# EAGLE board mainboardv0.2.1 (EAGLE 6.5.0)
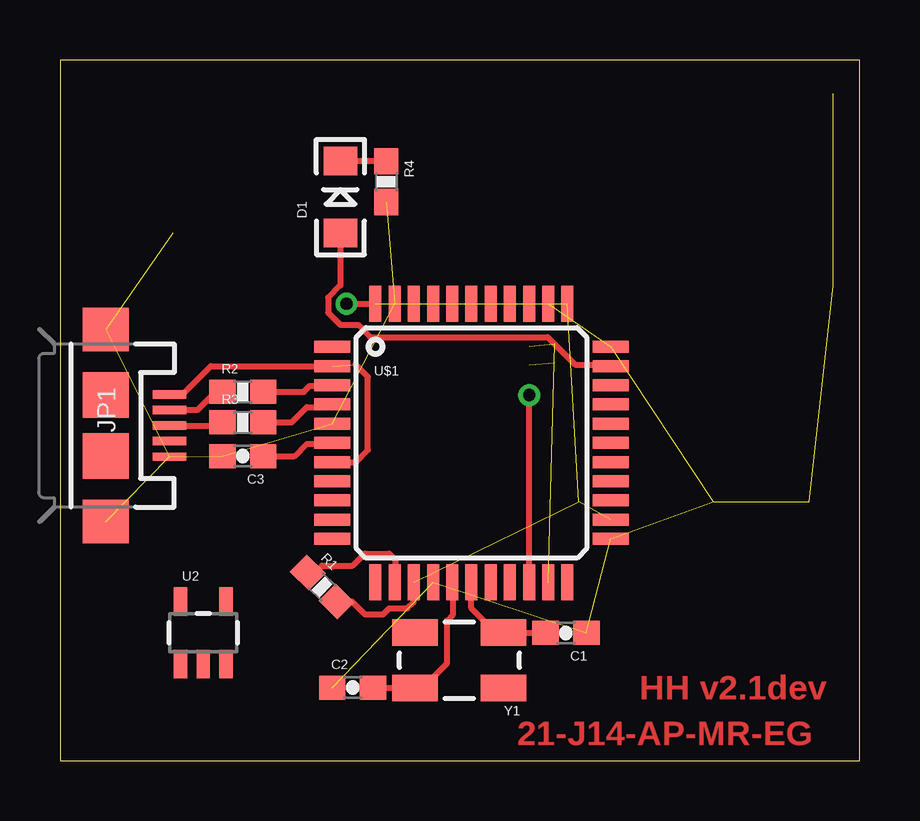
[diagram p0: board, top side]
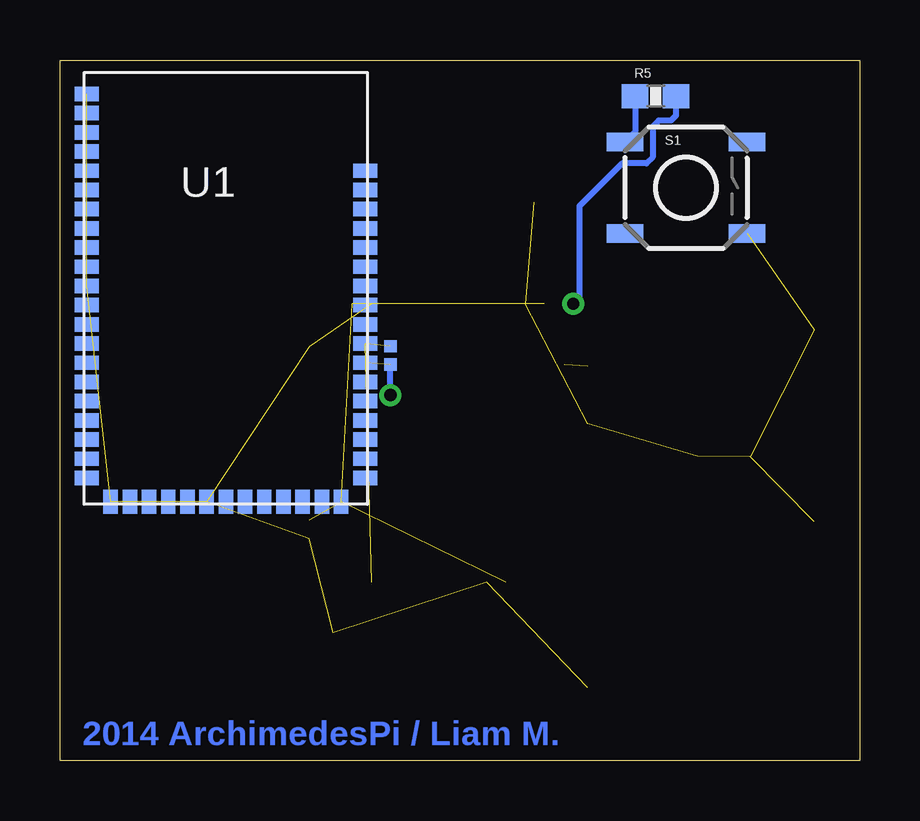
[diagram p1: board, bottom side, seen from below]

Size 33.33 x 29.2 mm. Coordinates in mm from the lower left corner, seen from the top.
Outline: 0,0 33.33,0 33.33,29.2 0,29.2 0,0
Copper layers (1*16): Top 0.035mm / dielectric 1.5mm / Bottom 0.035mm
Design rules "default": minimum track width 10mil, minimum drill 24mil, track to track 8mil, track to pad 8mil, pad to pad 8mil, via to via 8mil, smd to smd 8mil, copper to edge 40mil, drill to drill 8mil, minimum pad ring 10mil, minimum via ring 8mil, stop-mask expansion 4mil, vias tented up to drill 0mil, thermal gap 10mil

## Footprints (pad centres in the part's own frame; a part is rotated, then mirrored left to right if it is on the bottom)
0603-CAP = smd 1.1 x 1: 1 -0.85,0; 2 0.85,0
LED-1206 = smd 1.2 x 1.4: A -1.5,0; C 1.5,0
USB-MICROB = smd 0.35 x 1.4: D+ 0,2.65; D- -0.65,2.65; GND 1.3,2.65; ID 0.65,2.65; VBUS -1.3,2.65 | smd 1.8 x 1.9: MT1 -4,0; MT2 4,0 | smd 1.9 x 1.9: P$1 -1.27,0; P$2 1.27,0
0603-RES = smd 1.1 x 1: 1 -0.85,0; 2 0.85,0
TACTILE_SWITCH_SMD = smd 1.524 x 0.762: 1 -2.54,1.905; 2 2.54,1.905; 3 -2.54,-1.905; 4 2.54,-1.905
PAD.02X.02 = smd 0.508 x 0.508: P$1 0,0
BC127 = smd 1 x 0.6: 1 -5.8,8.1; 2 -5.8,7.3; 3 -5.8,6.5; 4 -5.8,5.7; 5 -5.8,4.9; 6 -5.8,4.1; 7 -5.8,3.3; 8 -5.8,2.5; 9 -5.8,1.7; 10 -5.8,0.9; 11 -5.8,0.1; 12 -5.8,-0.7; 13 -5.8,-1.5; 14 -5.8,-2.3; 15 -5.8,-3.1; 16 -5.8,-3.9; 17 -5.8,-4.7; 18 -5.8,-5.5; 19 -5.8,-6.3; 20 -5.8,-7.1; 21 -5.8,-7.9; 35 5.8,-7.9; 36 5.8,-7.1; 37 5.8,-6.3; 38 5.8,-5.5; 39 5.8,-4.7; 40 5.8,-3.9; 41 5.8,-3.1; 42 5.8,-2.3; 43 5.8,-1.5; 44 5.8,-0.7; 45 5.8,0.1; 46 5.8,0.9; 47 5.8,1.7; 48 5.8,2.5; 49 5.8,3.3; 50 5.8,4.1; 51 5.8,4.9 | smd 0.6 x 1: 22 -4.8,-8.9; 23 -4,-8.9; 24 -3.2,-8.9; 25 -2.4,-8.9; 26 -1.6,-8.9; 27 -0.8,-8.9; 28 0,-8.9; 29 0.8,-8.9; 30 1.6,-8.9; 31 2.4,-8.9; 32 3.2,-8.9; 33 4,-8.9; 34 4.8,-8.9
SOT23-5 = smd 0.55 x 1.2: 1 -0.95,-1.3; 2 0,-1.3; 3 0.95,-1.3; 4 0.95,1.3; 5 -0.95,1.3
SPARKFUN-DIGITALIC_TQFP44 = smd 1.5 x 0.5: 1 -5.8,4; 2 -5.8,3.2; 3 -5.8,2.4; 4 -5.8,1.6; 5 -5.8,0.8; 6 -5.8,0; 7 -5.8,-0.8; 8 -5.8,-1.6; 9 -5.8,-2.4; 10 -5.8,-3.2; 11 -5.8,-4; 23 5.8,-4; 24 5.8,-3.2; 25 5.8,-2.4; 26 5.8,-1.6; 27 5.8,-0.8; 28 5.8,0; 29 5.8,0.8; 30 5.8,1.6; 31 5.8,2.4; 32 5.8,3.2; 33 5.8,4 | smd 0.5 x 1.5: 12 -4,-5.8; 13 -3.2,-5.8; 14 -2.4,-5.8; 15 -1.6,-5.8; 16 -0.8,-5.8; 17 0,-5.8; 18 0.8,-5.8; 19 1.6,-5.8; 20 2.4,-5.8; 21 3.2,-5.8; 22 4,-5.8; 34 4,5.8; 35 3.2,5.8; 36 2.4,5.8; 37 1.6,5.8; 38 0.8,5.8; 39 0,5.8; 40 -0.8,5.8; 41 -1.6,5.8; 42 -2.4,5.8; 43 -3.2,5.8; 44 -4,5.8
CRYSTAL-SMD-5X3 = smd 1.9 x 1.1: 1 -1.85,-1.15; 2 1.85,-1.15; 3 1.85,1.15; 4 -1.85,1.15

## Placement (x,y rotation side)
C1  22pF  [0603-CAP]  21.08,5.33 180 top
C2  22pF  [0603-CAP]  12.19,3.05 0 top
C3  1.0uF  [0603-CAP]  7.62,12.7 180 top
D1  GREEN  [LED-1206]  11.68,23.5 90 top
JP1  USB-MICROB  [USB-MICROB]  1.91,13.97 270 top
R1  10K  [0603-RES]  10.92,7.24 315 top
R2  22  [0603-RES]  7.62,15.37 0 top
R3  22  [0603-RES]  7.62,14.1 0 top
R4  300  [0603-RES]  13.59,24.13 270 top
R5  1K  [0603-RES]  8.51,27.69 0 bottom
S1  [TACTILE_SWITCH_SMD]  7.24,23.88 0 bottom
TP1  BC_RX  [PAD.02X.02]  19.56,17.27 90 bottom
TP2  BC_TX  [PAD.02X.02]  19.56,16.51 0 bottom
U1  BC127  [BC127]  26.42,19.68 0 bottom
U2  [SOT23-5]  5.97,5.33 0 top
U$1  ATMEGA32U4TQFP  [SPARKFUN-DIGITALIC_TQFP44]  17.14,13.25 0 top
Y1  MHz  [CRYSTAL-SMD-5X3]  16.64,4.19 180 top

## Library data of the parts
C1 C2 = SparkFun-Capacitors; PROD_ID: CAP-07876
C3 = SparkFun-Capacitors; PROD_ID: CAP-00868
D1 = SparkFun-LED; PROD_ID: DIO-00862
JP1 = SparkFun-Connectors; PROD_ID: CONN-09505
R1 = SparkFun-Resistors; PROD_ID: RES-00824
R2 R3 = SparkFun-Resistors; PROD_ID: RES-08698
R4 = SparkFun-Resistors; PROD_ID: RES_10328
R5 = SparkFun-Resistors; PROD_ID: RES-07856
S1 = SparkFun-Electromechanical; PROD_ID: SWCH-08247
TP1 TP2 = SparkFun-Passives
U1 = SparkFun-RF
U2 = SparkFun-PowerIC; PROD_ID: VREG-00822
U$1 = SparkFun-DigitalIC; PROD_ID: IC-11161
Y1 = SparkFun-FreqCtrl

## Nets
+3V3: R1.2 R5.2 U1.34 U$1.14 U$1.24 U$1.34 U$1.44
BUTTON: S1.2
D+: R3.2 U$1.4
D-: R2.2 U$1.3
GND: C1.1 C2.1 C3.2 JP1.GND JP1.MT1 JP1.MT2 R4.2 S1.4 U1.1 U1.2 U1.3 U1.4 U1.11 U1.22 U1.27 U$1.5 U$1.15 U$1.23 U$1.33 U$1.35 U$1.43
LED: D1.A U$1.32
N$1: R1.1 U$1.13
N$2: C1.2 U$1.17 Y1.1
N$3: C2.2 U$1.16 Y1.3
N$4: C3.1 U$1.6
N$5: D1.C R4.1
N$6: R5.1 S1.1
N$7: JP1.D- R2.1
N$8: JP1.D+ R3.1
N$9: TP2.P$1 U1.41 U$1.20
N$10: TP1.P$1 U1.42 U$1.21
VCC/2: JP1.VBUS U$1.2 U$1.7

## Tracks (layer width: path | path; a pad name or v marks a point on that pad's centre or on a via)
+3V3  (via drill 0.51)  (4 unrouted)
  Top 0.254: v11.94,19.05 U$1.44 | R1.2 12.16,6.64 12.7,6.1 13.46,6.1 13.72,6.35 14.48,6.35 14.73,6.6 14.73,7.44 U$1.14
  Bottom 0.254: R5.2 7.66,26.89 7.87,26.67 8.38,26.67 8.64,26.42 8.64,25.15 8.89,24.89 9.91,24.89 11.68,23.11 11.68,19.3 v11.94,19.05
D+
  Top 0.254: R3.2 9.65,14.1 10.29,14.73 11.23,14.73 U$1.4
D-
  Top 0.254: R2.2 10.16,15.37 10.41,15.62 11.32,15.62 U$1.3
GND  (20 unrouted)
LED
  Top 0.254: D1.A 11.68,19.81 11.18,19.3 11.18,18.67 11.68,18.16 12.45,18.16 12.95,17.65 20.32,17.65 21.46,16.51 22.89,16.51 U$1.32
N$1
  Top 0.254: R1.1 10.63,7.84 10.92,8.13 12.19,8.13 12.7,8.64 13.72,8.64 13.97,8.38 13.97,7.47 U$1.13
N$2
  Top 0.254: C1.2 Y1.1 18.15,5.34 17.14,6.35 U$1.17
N$3
  Top 0.254: C2.2 Y1.3 15.11,3.04 16.13,4.06 16.13,5.84 16.38,6.1 16.38,7.41 U$1.16
N$4
  Top 0.254: C3.1 9.78,12.7 10.29,13.21 11.3,13.21 U$1.6
N$5
  Top 0.254: D1.C 13.57,25 R4.1
N$6
  Bottom 0.254: R5.1 9.36,26.2 S1.1
N$7
  Top 0.254: JP1.D- 5.73,14.62 6.35,15.24 6.64,15.24 R2.1
N$8
  Top 0.254: JP1.D+ 6.64,13.97 R3.1
N$9  (via drill 0.51 pad 0.25)  (1 unrouted)
  Top 0.254: U$1.20 v19.56,15.24
  Bottom 0.254: v19.56,15.24 TP2.P$1
N$10  (2 unrouted)
VCC/2  (1 unrouted)
  Top 0.254: JP1.VBUS 5.11,15.27 6.29,16.45 U$1.2 | U$1.7 12.32,12.45 12.83,12.95 12.83,16 12.32,16.51

## Text on the board
Top: HH v2.1dev | 21-J14-AP-MR-EG
Bottom: 2014 ArchimedesPi / Liam M.